# EAGLE board POVMEGA (EAGLE 7.6.0)
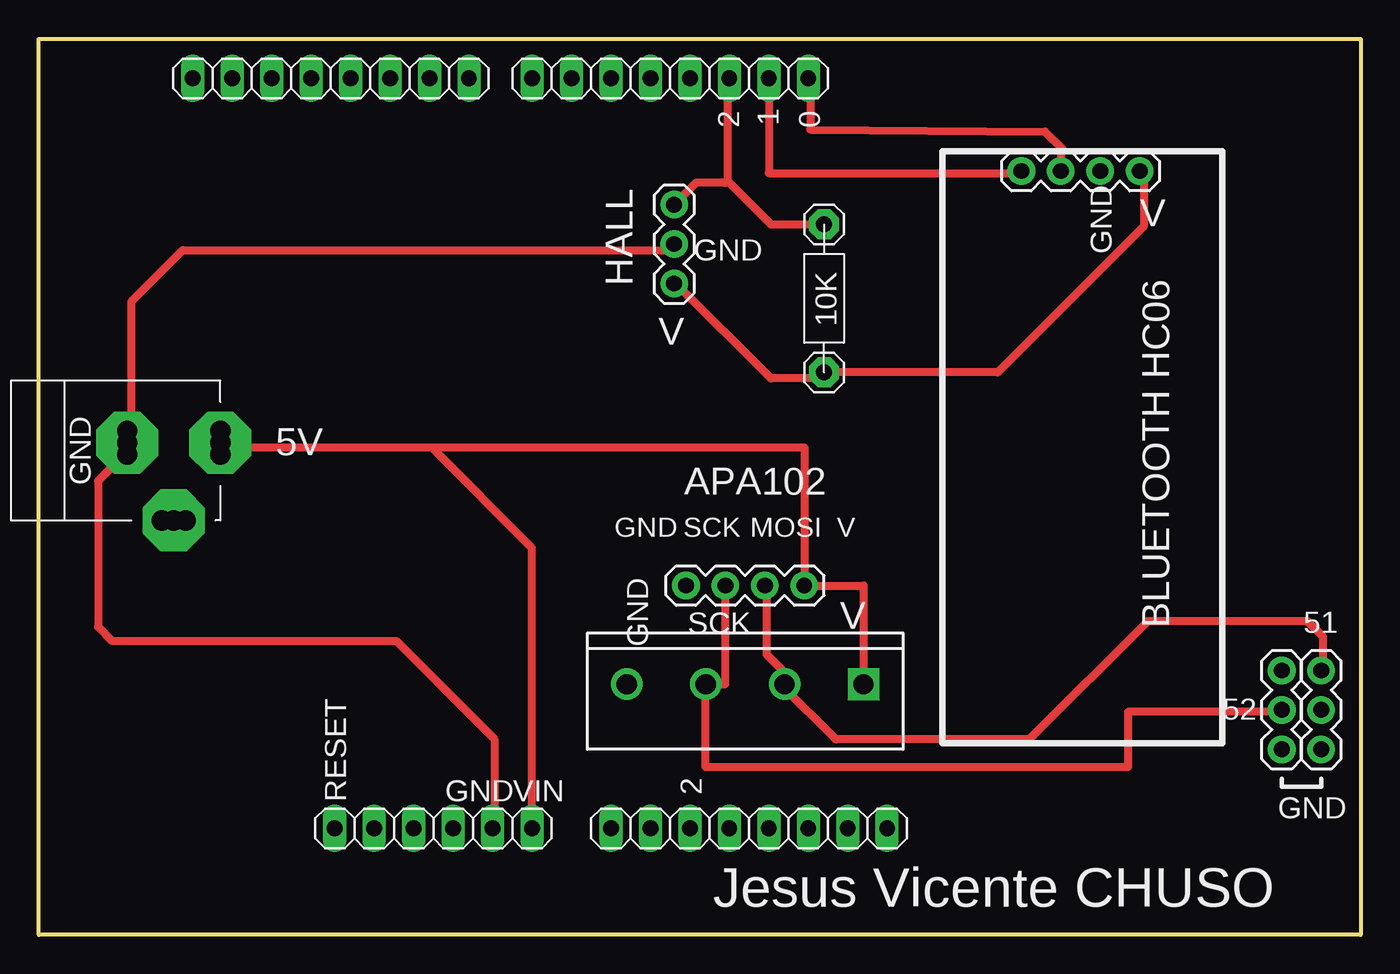
[diagram p0: board, top side]
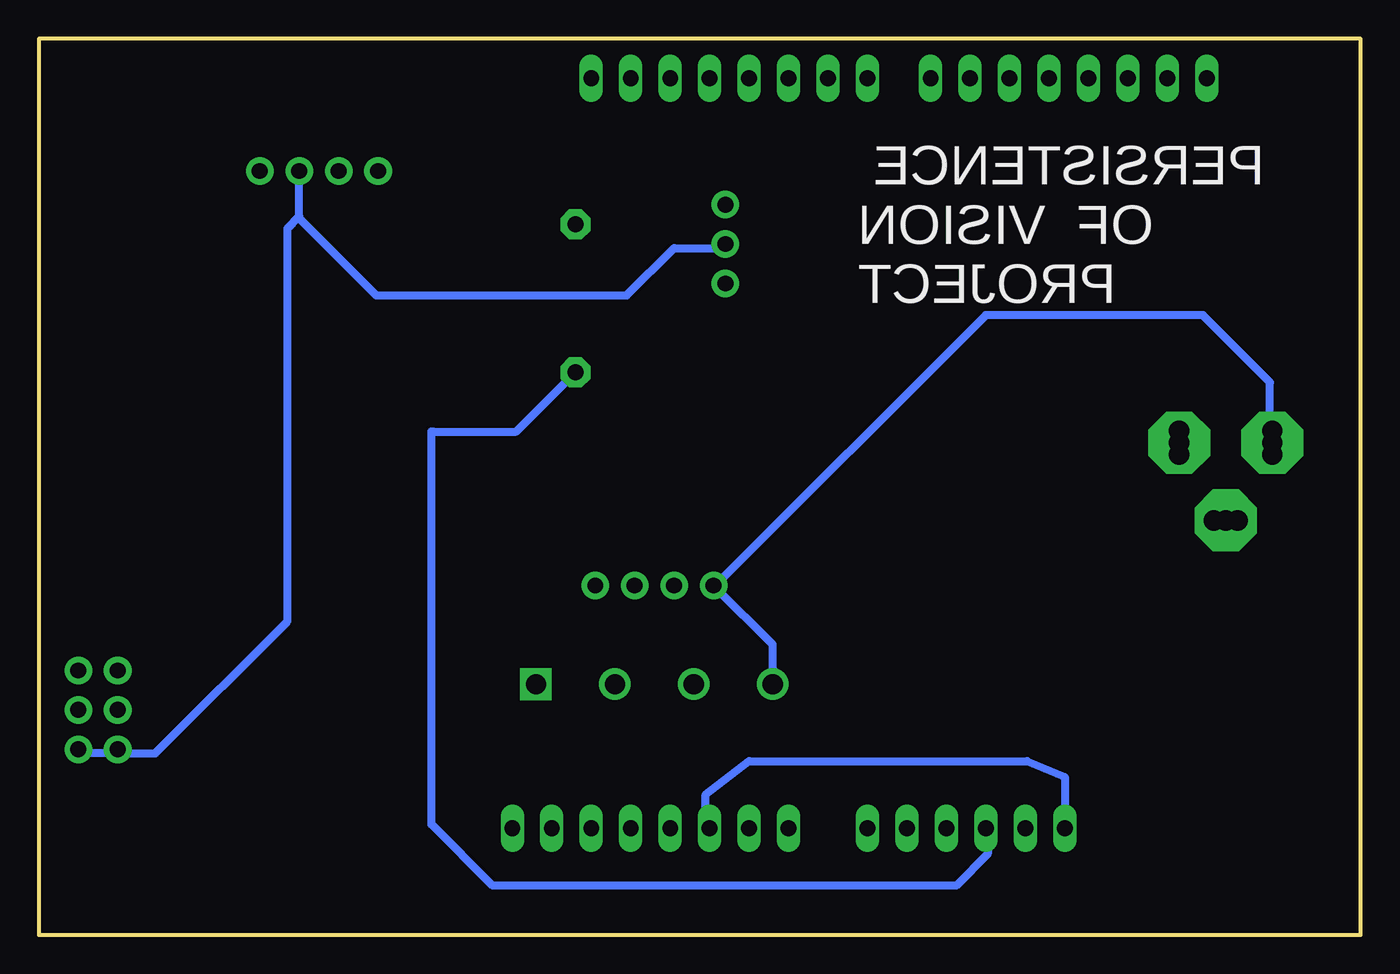
[diagram p1: board, bottom side, seen from below]

Size 85.09 x 57.66 mm. Coordinates in mm from the lower left corner, seen from the top.
Outline: 0,57.66 85.09,57.66 85.09,0 0,0 0,57.66
Copper layers (1*16): Top 0.035mm / dielectric 1.5mm / Bottom 0.035mm
Design rules "default": minimum track width 10mil, minimum drill 24mil, track to track 8mil, track to pad 8mil, pad to pad 8mil, via to via 8mil, smd to smd 8mil, copper to edge 40mil, drill to drill 8mil, minimum pad ring 10mil, minimum via ring 8mil, stop-mask expansion 4mil, vias tented up to drill 0mil, thermal gap 10mil

## Footprints (pad centres in the part's own frame; a part is rotated, then mirrored left to right if it is on the bottom)
1X08 = drill 1.016 long: 1 -8.89,0; 2 -6.35,0; 3 -3.81,0; 4 -1.27,0; 5 1.27,0; 6 3.81,0; 7 6.35,0; 8 8.89,0
PIN3UD = drill 1.016 pad 1.778: 1 0,0; 2 2.54,0; 3 5.08,0
PIN4UD = drill 1.016 pad 1.778: 1 0,0; 2 2.54,0; 3 5.08,0; 4 7.62,0
SCREWBLOCK5MM_4U = drill 1.3 pad 2.032 square: 1 0,0 | drill 1.3 pad 2.032: 2 5.08,0; 3 10.16,0; 5 15.24,0
POWERSUPPLY_DC-21MM = drill 1.3 pad 4 octagon: 1 -5.08,-3.353; 2 -0.076,-6.35; 3 -0.076,-0.356 | drill 1.3: 4 -5.08,-4.115; 5 -5.08,-2.591; 6 -0.838,-0.356; 7 0.686,-0.356; 8 -0.838,-6.35; 9 0.686,-6.35
RESISTENCIA_GENERICA = drill 1.016 pad 1.93 octagon: 1 0,0; 2 9.525,0
1X06 = drill 1.016 long: 1 -6.35,0; 2 -3.81,0; 3 -1.27,0; 4 1.27,0; 5 3.81,0; 6 6.35,0

## Placement (x,y rotation side)
ADCL1  [1X08]  45.72,6.86 0 top
E$1  [PIN3UD]  40.89,41.91 90 top
E$2  [PIN4UD]  63.25,49.15 0 top
E$3  [SCREWBLOCK5MM_4U]  53.09,16.13 180 top
E$9  [PIN4UD]  49.28,22.48 180 top
E$11  [PIN3UD]  82.55,17.02 270 top
E$12  [PIN3UD]  80.01,17.02 270 top
E$13  [POWERSUPPLY_DC-21MM]  5.33,31.75 90 top
E$15  [RESISTENCIA_GENERICA]  50.55,36.2 90 top
POWER1  [1X06]  25.4,6.86 0 top
PWMH1  [1X08]  18.8,55.12 180 top
PWML1  [1X08]  40.64,55.12 180 top

## Library data of the parts
ADCL1 POWER1 PWMH1 PWML1 = pinhead
E$1-E$3 E$9 E$11 E$12 E$15 = chuso
E$13 = SmartPrj

## Nets
S$2: E$2.4
S$9: E$2.1
S$18: E$3.1 E$9.1
S$28: POWER1.1

## Tracks (layer width: path | path; a pad name or v marks a point on that pad's centre or on a via)
S$2
  Top 0.508: E$2.4 71.12,49.15 71.12,45.59 61.72,36.2 50.55,36.2
S$3
  Bottom 0.508: 5.84,31.75 5.84,35.56 10.16,39.88 24.13,39.88 41.78,22.23
S$4
  Top 0.508: 5.72,31.62 5.72,31.37
S$5
  Top 0.508: 34.29,54.99 34.42,54.99
S$6
  Bottom 0.508: 17.65,54.99 17.53,54.99
S$7
  Top 0.508: 5.46,31.5 5.46,30.86 3.81,29.21 3.81,19.81 4.7,18.92 22.99,18.92 29.34,12.57 29.34,6.99 28.96,6.6
S$8
  Top 0.508: 31.75,54.99 31.62,54.99
S$9
  Top 0.508: 46.99,55.12 46.99,49.02 63.12,49.02 E$2.1
S$10
  Top 0.508: 49.66,54.99 49.66,51.82 64.77,51.69 65.91,50.55
S$11
  Top 0.508: 80.01,14.35 70.1,14.35 70.1,10.8 42.93,10.8 42.93,15.62
S$12
  Top 0.508: 43.18,16.13 44.2,16.13 44.2,22.23
S$13
  Bottom 0.508: 59.69,32.38 54.36,32.38 50.8,35.94
S$14
  Top 0.508: 44.32,54.99 44.32,48.51 47.12,45.72 50.67,45.72 50.93,45.47
S$15
  Top 0.508: 44.2,48.39 42.29,48.39 40.77,46.86
S$16
  Top 0.508: 50.67,35.81 47.12,35.81 41.02,41.91
S$17
  Top 0.508: 5.97,31.75 5.97,40.77 9.27,44.07 40.64,44.07 41.02,44.45
S$18
  Top 0.508: 31.88,6.99 31.75,6.99 31.75,24.89 25.27,31.37 | 11.18,31.37 25.27,31.37 | 25.27,31.37 49.28,31.37 E$9.1 53.09,22.48 E$3.1
S$24
  Top 0.508: 82.68,17.02 82.68,19.18 81.66,20.19 71.37,20.19 63.75,12.57 51.31,12.57 47.88,16 47.88,17.02 46.86,18.03 46.86,22.48
S$25
  Bottom 0.508: 80.14,11.68 77.6,11.68 69.09,20.19 69.09,45.47 68.33,46.23 | 68.33,46.23 68.33,49.02 68.45,49.15 | 68.33,46.23 68.33,46.1 63.37,41.15 47.24,41.15 44.2,44.2 41.02,44.2 40.77,44.45
S$27
  Bottom 0.508: 41.78,22.86 41.53,22.61
S$28
  Bottom 0.508: 42.16,7.24 42.16,9.02 39.37,11.18 21.46,11.18 19.05,10.16 POWER1.1
S$29
  Bottom 0.508: 37.85,16 37.85,18.67 41.53,22.35
S$30
  Bottom 0.508: 80.26,11.68 82.55,11.68 82.68,11.81
S$32
  Top 0.508: 65.79,50.42 65.79,49.28 65.91,49.15
S$35
  Bottom 0.508: 24,6.99 24,5.21 26.04,3.18 55.88,3.18 59.82,7.11 59.82,32.38

## Text on the board
tPlace: 2 | 1 | 0 | 51 | 52 | 2
tNames: V | GND | GND | 10K | HALL | BLUETOOTH HC06 | V | GND | 5V | APA102 | GND | SCK | MOSI | V | SCK | V | GND | RESET | GND | VIN | GND | Jesus Vicente CHUSO
bNames: PERSISTENCE / OF VISION / PROJECT